# Altium PCB CurruntGetter.PcbDoc
Units mil, origin at the board's own origin, x right, y up, seen from the top; angles counter-clockwise.
Board outline 3820.48 x 2120.03 mil, 2 copper layers (Top Layer, Bottom Layer); 55 components, 31 nets, 190 pads, 33 vias.
Unrouted connection lines stored in the file: 22.
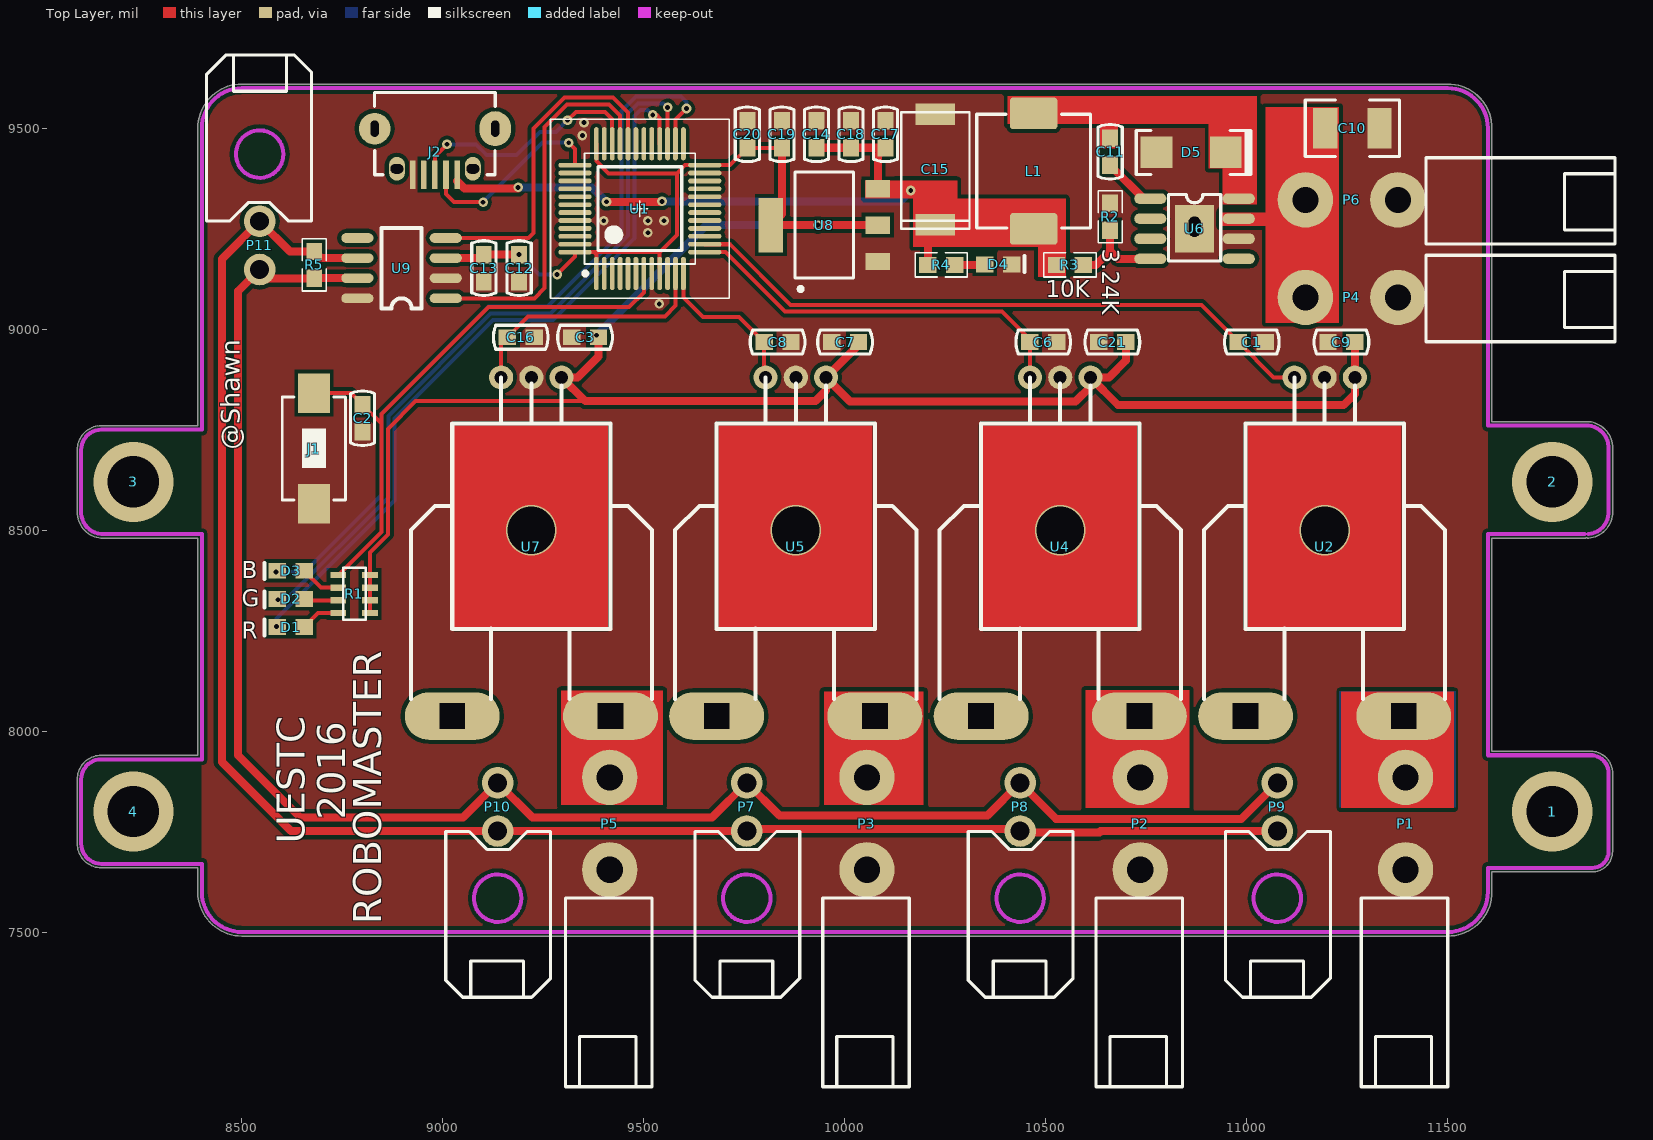
[diagram p0: Top Layer view]
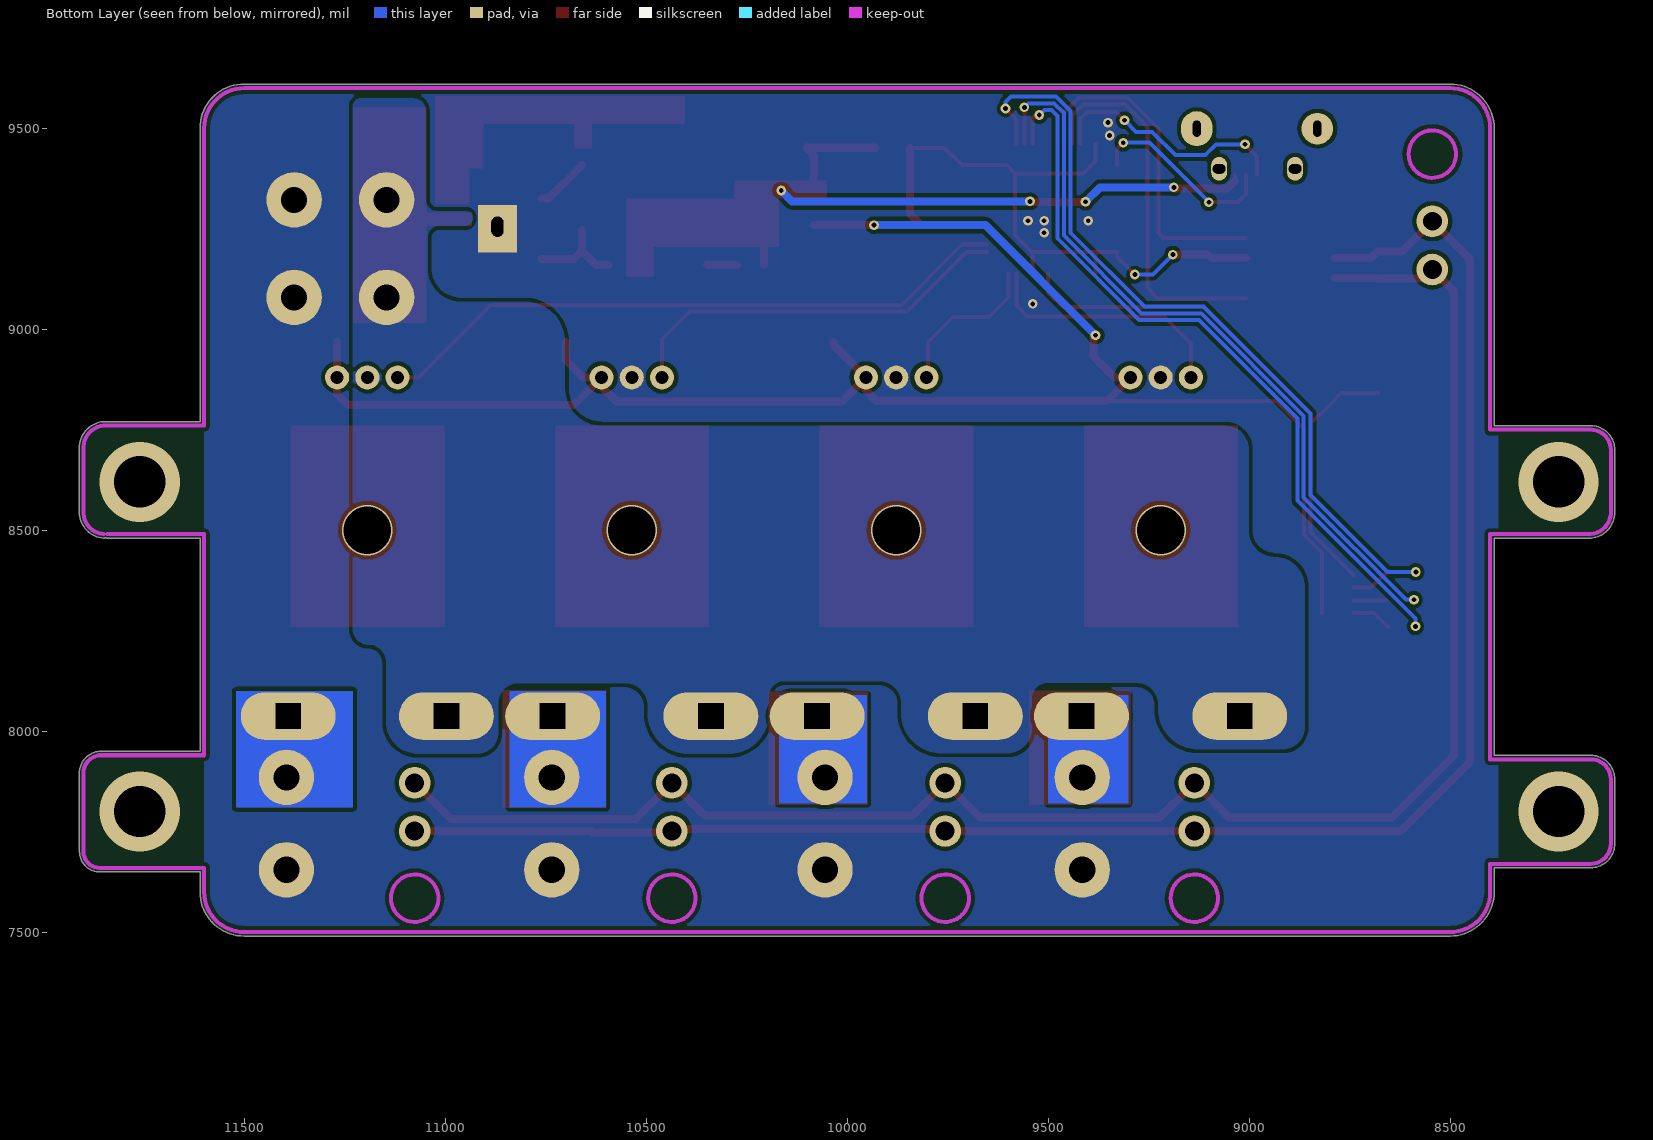
[diagram p1: Bottom Layer view, seen from below]

## Layer stack, top to bottom
Top Solder: solder mask 0.4, Solder Resist, Dk 3.5
Top Layer: signal copper 1.4
Dielectric 1: dielectric 12.6, FR-4, Dk 4.8
Bottom Layer: signal copper 1.4
Bottom Solder: solder mask 0.4, Solder Resist, Dk 3.5

## Board outline
8089.98,7720 ccw(c8150,7720) 8150,7659.98 ccw(c8150,7670) 8150.04,7659.98 8389.99,7659.98 8389.99,7600 ccw(c8500,7600) 8500,7489.98 11500,7489.98 ccw(c11500,7600) 11610.01,7600 11610.01,7649.98 11860,7649.98 ccw(c11860,7700) 11910.01,7700 11910.01,7900 ccw(c11900,7900) 11909.95,7901.11 ccw(c11855,7895) 11861.11,7949.95 ccw(c11855,7895) 11849.47,7950.02 11610.01,7950.02 11610.01,8479.99 11840,8479.99 ccw(c11840,8490) 11845,8481.32 ccw(c11850,8490) 11850.91,8480.03 ccw(c11845,8545) 11910.24,8545 ccw(c11845,8545) 11910.01,8550.44 11910.01,8699.56 ccw(c11845,8705) 11910.24,8705 ccw(c11845,8705) 11850.91,8769.97 ccw(c11850,8760) 11850,8770.01 11610.01,8770.01 11610.01,9500 ccw(c11500,9500) 11500,9610.01 8500,9610.01 ccw(c8500,9500) 8389.99,9500 8389.99,8760.01 8150,8760.01 8150,8760.02 cw(c8150,8750) 8150.04,8760.01 8150,8760.02 ccw(c8150,8700) 8089.98,8700 8089.98,8550.44 ccw(c8155,8545) 8090.03,8539.09 ccw(c8155,8545) 8149.09,8480.03 ccw(c8150,8490) 8150,8479.99 8389.99,8479.99 8389.99,7940.02 8150,7940.02 cw(c8150,7930) 8150.04,7940.02 8150,7940.02 ccw(c8150,7880) 8089.98,7880

## Design rules (kind name [scope] priority, off if disabled: settings)
Clearance [All] p1: gap=6
HoleSize [All] p1: absolutevalues=TRUE maxlimit=23333 minlimit=1 maxpercent=80.000 minpercent=20.000
HoleToHoleClearance [All] p1: gap=0 allowstackedmicrovias=TRUE
MinimumSolderMaskSliver [All] p1: minsoldermaskwidth=0
PolygonConnect [All] p1: connectstyle=Direct reliefconductorwidth=10 reliefentries=4 polygonreliefangle="90 Angle" airgapwidth=10
RoutingVias [All] p1: holewidth=28 width=50 viastyle="Through Hole" minholewidth=12 minwidth=24 maxholewidth=2333 maxwidth=2333
SilkToSilkClearance [All] p1: silktosilkclearance=0
SilkToSolderMaskClearance [IsPad] p1: minsilkscreentomaskgap=0 clearancetoexposedcopper=TRUE
SolderMaskExpansion [All] p1: expansion=4
Width [All] p1: maxlimit=2333 minlimit=10 preferedwidth=10
25 further rules are at their usual default settings.

## Components (designator, comment, footprint, x,y, rotation, side; value= is the part's Value field where it differs from the comment)
1 "Via_M3" Via_M3 11760,7800 r90 top
2 "Via_M3" Via_M3 11760,8620 r90 top
3 "Via_M3" Via_M3 8230,8620 r90 top
4 "Via_M3" Via_M3 8230,7800 r90 top
C1 "104" 0603C 11011,8968 r0 top
C2 "104" 0603C 8800,8780 r270 top
C3 "104" 0603C 9352,8980 r0 top
C6 "104" 0603C 10492,8968 r0 top
C7 "104" 0603C 9999,8968 r0 top
C8 "104" 0603C 9831,8968 r0 top
C9 "104" 0603C 11234,8968 r0 top
C10 "100uF" 1201C 11260,9500 r90 top
C11 "105" 0603C 10660,9440 r90 top
C12 "104" 0603C 9189.56,9153.57 r270 top
C13 "106" 0603C 9101.68,9153.57 r270 top
C14 "104" 0603C 9929.25,9486.47 r270 top
C15 "CAP_钽220" cap_钽E封装 10220,9400 r180 top
C16 "104" 0603C 9192,8980 r0 top
C17 "104" 0603C 10101.06,9486.47 r270 top
C18 "106" 0603C 10015.16,9486.47 r270 top
C19 "104" 0603C 9843.35,9486.47 r270 top
C20 "106" 0603C 9757.44,9486.47 r270 top
C21 "104" 0603C 10664,8968 r0 top
D1 "LED" LED_0603 8620,8260 r180 top
D2 "LED" LED_0603 8620,8330 r180 top
D3 "LED" LED_0603 8620,8400 r180 top
D4 "LED" LED_0603 10382.49,9160.1 r0 top
D5 "Diode_SS34" Diode_SS34 10860,9440 r0 top
J1 "KEY" KEY 8680,8700 r0 top
J2 "USB_MICRO" USB_MICRO 8980,9442 r180 top
L1 "15uH" Inductor7.2X7.2 10468,9400 r270 top
P1 "Header2X1" Header_POWER 11400,7520 r0 top
P2 "Header2X1" Header_POWER 10740,7520 r0 top
P3 "Header2X1" Header_POWER 10060,7520 r0 top
P4 "Header2X1" Header_POWER 11510.9,9083.94 r90 top
P5 "Header2X1" Header_POWER 9420,7520 r0 top
P6 "Header2X1" Header_POWER 11510.9,9326.81 r90 top
P7 "Header_CAN" Header2_3002 9760,7600 r0 top
P8 "Header_CAN" Header2_3002 10440,7600 r0 top
P9 "Header_CAN" Header2_3002 11080,7600 r0 top
P10 "Header_CAN" Header2_3002 9140,7600 r0 top
P11 "Header_CAN" Header2_3002 8540,9420 r180 top
R1 "1K" 8P4R_0603 8780,8340 r90 top
R2 "3K3" 0603R 10660,9280 r90 top
R3 "10K" 0603R 10560,9160 r0 top
R4 "1K" 0603R 10240,9160 r180 top
R5 "120" 0603R 8680,9160 r270 top
U1 "STM32F103CBT6" LQFP_48 9500,9300 r90 top
U2 "ACS758" PFF 11193.76,8880 r180 top
U4 "ACS758" PFF 10535.84,8880 r180 top
U5 "ACS758" PFF 9877.92,8880 r180 top
U6 "TPS5430/5450" TPS5430 10880,9260 r0 top
U7 "ACS758" PFF 9220,8880 r180 top
U8 "1117" SOT-223 9940,9260 r90 top
U9 "VD230" SO_8 8900,9160 r180 top

## Footprints (in the part's own frame and the unit in brackets; to place one, negate y for a bottom-side part, rotate by r counter-clockwise, add the part's x,y. Pads: shape width x height; smd on the part's side, far side on the other; paste and mask are expansions set on the pad)
8P4R_0603 [mm]
  rect 0.4x1 smd: 1(-1.169,-0.976) 2(-0.369,-0.976) 3(0.431,-0.976) 4(1.231,-0.976) 5(1.231,1.024) 6(0.431,1.024) 7(-0.369,1.024) 8(-1.169,1.024)
  silkscreen extent -1.6,-0.7 1.7,0.7, body extent -1.6,-1 1.7,1, height 0.7
0603C [mm]
  rect 1.1x1 smd: 1(-0.811,0) 2(0.889,0)
  silkscreen extent -1.69,-0.76 1.77,0.76, body extent -1.29,-0.47 1.31,0.53, height 0.89
0603R [mm]
  rect 1.1x1 smd: 1(-0.85,0) 2(0.85,0)
  silkscreen extent -1.65,-0.76 1.65,0.76, body extent -0.8,-0.4 0.8,0.4, height 0.45
1201C [mil]
  rect 100x60 smd: 1(0,64.72) 2(0,-70.28)
  silkscreen extent -70,-120 70,115, body extent -65,-115 65,110, height 100
cap_钽E封装 [mil]
  rect 98.43x53.54 smd: 1(-5,-135) 2(-5,140)
  silkscreen extent -90,-140 80,150, body extent -90,-165 80,170, height 161
Diode_SS34 [mm]
  rect 2x2 smd: 1(-2.15,0) 2(2.225,0)
  silkscreen extent -3.43,-1.4 3.81,1.38, body extent -2.4,-1.4 2.45,1.38, height 1.4
Header2_3002 [mm]
  round 2 hole 1.2: 1(-0.1,6.895) 2(-0.1,3.845)
  Keep-Out Layer circle w0.254: c-0.1,-0.398 r1.5
  silkscreen extent -3.38,-6.66 3.25,3.82, body extent -3.3,-6.73 3.17,7.28, height 7.11
Header_POWER [mm]
  round 3.5 hole 1.65: 1(-0.127,9.271) 2(-0.127,3.429)
  silkscreen extent -2.92,-10.29 2.54,1.65, body extent -2.92,-10.54 2.54,10.03, height 11.43
Inductor7.2X7.2 [mm]
  rrect20% 2x3 smd: 1(-3.479,0.044) 2(3.821,0.044)
  silkscreen extent -3.43,-3.56 3.77,3.64, body extent -3.4,-3.56 3.76,3.63, height 4
KEY [mm]
  rect 2x2.5 smd: 1(-0.025,3.581) 2(-0.025,-3.419)
  silkscreen extent -2.03,-3.17 1.97,3.33, body extent -2.06,-3.15 2.01,3.33, height 1.2
LED_0603 [mm]
  rect 1.1x1 smd: 1(-0.875,0.025) 2(0.825,0.025)
  silkscreen extent 1.63,-0.46 1.63,0.56, body extent -1.52,-0.51 1.4,0.64, height 0.66
LQFP_48 [mm]
  oval 2.1x0.3 smd: 1(-4.1,3.004) 2(-4.1,2.504) 3(-4.1,2.004) 4(-4.1,1.504) 5(-4.1,1.004) 6(-4.1,0.504) 7(-4.1,0.004) 8(-4.1,-0.496) 9(-4.1,-0.996) 10(-4.1,-1.496) 11(-4.1,-1.996) 12(-4.1,-2.496) 25(4.1,-2.496) 26(4.1,-1.996) 27(4.1,-1.496) 28(4.1,-0.996) 29(4.1,-0.496) 30(4.1,0.004) 31(4.1,0.504) 32(4.1,1.004) 33(4.1,1.504) 34(4.1,2.004) 35(4.1,2.504) 36(4.1,3.004)
  oval 0.3x2.1 smd: 13(-2.75,-3.846) 14(-2.25,-3.846) 15(-1.75,-3.846) 16(-1.25,-3.846) 17(-0.75,-3.846) 18(-0.25,-3.846) 19(0.25,-3.846) 20(0.75,-3.846) 21(1.25,-3.846) 22(1.75,-3.846) 23(2.25,-3.846) 24(2.75,-3.846) 37(2.75,4.354) 38(2.25,4.354) 39(1.75,4.354) 40(1.25,4.354) 41(0.75,4.354) 42(0.25,4.354) 43(-0.25,4.354) 44(-0.75,4.354) 45(-1.25,4.354) 46(-1.75,4.354) 47(-2.25,4.354) 48(-2.75,4.354)
  silkscreen extent -5.65,-5.4 5.65,5.9, body extent -3.5,-3.25 3.5,3.75, height 1.6
PFF [mm]
  round 1.524 hole 0.82: 1(-1.91,0) 2(0,0) 3(1.91,0)
  oval 6x3 hole 1.6 square: 4(5,21.4) 5(-5,21.4)
  Top Layer region: -4.851,3.023 4.877,3.023 4.877,15.773 -4.851,15.773
  silkscreen extent -7.62,0.01 7.62,20.32
SO_8 [mil]
  oval 80x24 smd: 1(-107,83) 2(-107,33) 3(-107,-17) 4(-107,-67) 5(113,-67) 6(113,-17) 7(113,33) 8(113,83)
  silkscreen extent -47,-92 53,108, body extent -91,-97 102,113, height 30
SOT-223 [mm]
  rect 1.1x1.55 smd: 1(-2.325,-3.604) 2(-0.025,-3.604) 3(2.275,-3.604)
  rect 3.45x1.55 smd: 2(-0.025,3.146)
  silkscreen extent -4.19,-2.08 3.32,1.62, body extent -3.33,-4.17 3.28,3.2, height 0.8
TPS5430 [mil]
  oval 80x26 smd: 1(-120,65) 2(-120,15) 3(-120,-35) 4(-120,-85) 5(100,-85) 6(100,-35) 7(100,15) 8(100,65)
  rect 98x118 smd: 6(-10,-10)
  rect 98x118 smd far side: 6(-10,-10)
  oval 50x70 hole 30 slot 50 at 90 deg: 6(-10,-5)
  silkscreen extent -75,-90 55,75, body extent -80,-100 60,80, height 30
USB_MICRO [mm]
  rect 0.35x1.8 smd: 1(-1.4,1.45) 2(-0.7,1.45) 3(0,1.45) 4(0.7,1.45) 5(1.4,1.45)
  oval 2x2.2 hole 0.508 slot 1.016 at 90 deg unplated: 6(-3.81,-1.45)
  oval 1x1.5 hole 0.6 slot 0.8 at 0 deg: 6(-2.4,1.09) 6(2.4,1.09)
  round 2 hole 0.508 slot 1.016 at 90 deg unplated: 6(3.81,-1.45)
  silkscreen extent -3.81,-3.74 3.81,1.47
Via_M3 [mil]

## Part data
C1 C2 C3 C6 C7 C8 C9 C11 C12 C14 C16 C17 C19 C21: library part C_104, "0603/0805"
C10: library part CAP100uF
C13 C18 C20: library part C_106, "0603/0805"
C15: "CAP"
D5: "肖特基二极管"
L1: library part Inductor, "屏蔽电感"
P1 P2 P3 P4 P5 P6: "power"
R1: library part R_8P4R
R2 R3 R4 R5: library part R, "0603/0805"
U1: "48"
U6: "降压"
U8: library part AMS1117-3.3
U9: "SO-8"

## Via types
v1: diameter 24, hole 12, Top Layer to Bottom Layer, tented both sides, 25 vias
v2: diameter 200, hole 128, Top Layer to Bottom Layer, 4 vias
v3: diameter 125.98, hole 118.11, Top Layer to Bottom Layer, 4 vias

## Nets (pads, with @x,y where several pads share a name; then routed paths per layer and width w, separated by ;. In a path a pad name is that pad's centre, name@x,y a point inside that pad or via, vN(x,y) a via of type N, cw(c..) or ccw(c..) an arc to the next point about the centre after c; other vN are vias at no path point)
3V3: C3.2 C7.2 C9.2 C12.1 C13.1 C19.2 C20.2 C21.2 R1.1 R1.2 R1.3 R1.4 U1.1 U1.9 U1.24 U1.36 U1.48 U2.1 U4.1 U5.1 U7.1 U8.2 U9.3 | length 6298.4
  Top Layer w10: R1.1 R1.2 R1.3 R1.4 8818.41,8444.58 8863,8489.18 8863,8752 8932,8821 9354.2,8821 ; v1(9284,9136) 9328.58,9180.58 U1.48 9375.27,9191.73 ; U1.1 9381.73,9185.27 9375.27,9191.73 ; U1.36 9381.73,9418.27 9412,9388 9582,9388 ; U1.9 9539.21,9191.21 ; C19.2 C20.2 9714.24,9408.27 U1.24 9602.27,9408.27 9582,9388 ; 9375.27,9191.73 9538.69,9191.73 9539.21,9191.21 ; 9539.21,9191.21 9582,9234 9582,9388
  Top Layer w20: U9.3 9093.19,9177 C13.1 v1(9189.56,9185.5) ; v1(9382,8985) C3.2 9387,8932 9335,8880 U7.1 9354.2,8821 9927,8821 9953.12,8847.12 U5.1 ; C19.2 9843.35,9286.22 9816.13,9259 v1(9933,9259) U8.2@10081.87,9259 ; C7.2 10034,8960.88 U5.1 ; C21.2 10699,8922 10657,8880 U4.1 ; C9.2 11269,8839 11241,8811 10680.04,8811 U4.1 ; U5.1 10013.12,8820 10574,8820 10611.04,8857.04 U4.1
  Bottom Layer w10: v1(9189.56,9185.5) 9239.06,9136 v1(9284,9136)
  Bottom Layer w20: v1(9382,8985) 9656,9259 v1(9933,9259)
5V: C14.2 C15.2 C17.2 C18.2 J2.1 L1.2 R3.1 R4.2 U8.3 | length 1571.6
  Top Layer w10: J2.1@9035.12,9368.88 J2.1
  Top Layer w20: J2.1@9035.12,9368.88 9054,9350 9187,9350 v1(9187,9353) ; v1(9407,9317) 9544,9317 v1(9545,9318) ; C14.2 C18.2 C17.2 10081.87,9432.28 U8.3 ; R4.2 10206.54,9241.54 C15.2
  Bottom Layer w20: v1(9187,9353) 9371,9353 v1(9407,9317) ; v1(9545,9318) 10137,9318 v1(10164,9345)
24V: C10.1 P4.1 P6.1 U2.4 U4.4 U5.4 U6.7 U7.4
CAN_H: P7.1 P8.1 P9.1 P10.1 P11.1 R5.2 U9.7 | length 4382.9
  Top Layer w20: U9.7 8680.46,9127 R5.2 8565.94,9126.54 P11.1 8490,9094.61 8490,7940 8645,7785 9049.61,7785 P10.1 9222.52,7785 9669.61,7785 P7.1 9837.52,7790 10354.61,7790 P8.1 10525.9,7781.62 10986.23,7781.62 P9.1
CAN_L: P7.2 P8.2 P9.2 P10.2 P11.2 R5.1 U9.6 | length 4369.4
  Top Layer w20: U9.6 8696.46,9177 R5.1 8619.09,9193.46 P11.2 8450,9174.68 8450,7923.43 8622.05,7751.38 P10.2 P7.2 9761.06,7756.38 10431.06,7756.38 P8.2 10439.44,7748 10633,7748 10636.38,7751.38 P9.2
CAN_RX: U1.32 U9.4 | length 844.4
  Top Layer w10: U9.4 9213,9227 9225,9239 9225,9499 9303,9577 9423,9577 9460.47,9539.53 U1.32
CAN_TX: U1.33 U9.1 | length 949.6
  Top Layer w10: U9.1 9228,9077 9253,9102 9253,9503 9309,9559 9413,9559 9440.79,9531.21 U1.33
CH1: C16.1 U1.11 U7.3 | length 637.4
  Top Layer w10: U7.3 9144.8,8964.73 C16.1 9212.07,9032 9552,9032 9578.58,9058.58 U1.11
CH2: C8.1 U1.12 U5.3 | length 390.9
  Top Layer w10: U1.12 9598.27,9078.73 9647,9030 9737.07,9030 C8.1 U5.3@9799.07,8883.65
CH3: C6.1 U1.13 U4.3 | length 985.9
  Top Layer w10: U1.13 9703.27,9191.73 9851,9044 10391,9044 C6.1@10460.07,8974.93 ; U4.3@10460.07,8880.57 C6.1
CH4: C1.1 U1.14 U2.3 | length 1604.4
  Top Layer w10: U1.14 9713.58,9211.42 9865,9060 10887.07,9060 C1.1 11067.07,8880 U2.3
CLK: J2.2 U1.37 | length 485.9
  Top Layer w10: J2.2 9007.56,9336.44 9028,9316 v1(9100,9316) ; v1(9313,9464) 9328.58,9448.42 U1.37
  Bottom Layer w10: v1(9100,9316) 9248,9464 v1(9313,9464)
DIO: J2.3 U1.34 | length 623.5
  Top Layer w10: J2.3 8980,9430 v1(9010,9460) ; v1(9310,9520) 9331,9541 9403,9541 9421.1,9522.9 U1.34
  Bottom Layer w10: v1(9010,9460) 9082,9460 9109,9433 9183,9433 9241,9491 9281,9491 v1(9310,9520)
GND: C1.2 C2.2 C3.1 C6.2 C7.1 C8.2 C9.1 C10.2 C12.2 C13.2 C14.1 C15.1 C16.2 C17.1 C18.1 C19.1 C20.1 C21.1 D4.2 D5.1 J1.2 J2.5 P1.2 P2.2 P3.2 P4.2 P5.2 P6.2 R2.2 U1.8 U1.20 U1.23 U1.35 U1.44 U1.47 U2.2 U4.2 U5.2 U6.6 U7.2 U8.1 U9.2 U9.8
  other v1: 9538,9063 9510,9240 9400,9270 9510,9270 9550,9270 9347,9482 9351,9514
LED_B: D3.2 U1.26 | length 1927.9
  Top Layer w10: U1.26 9578.58,9521.58 v1(9606,9549)
  Bottom Layer w10: v1(8585,8396) 8655,8396 8847,8588 8847,8790.25 9112.75,9056 9260,9056 9444,9240 9444,9543.25 9479.75,9579 9592,9579 9606,9565 v1(9606,9549)
LED_G: D2.2 U1.27 | length 1873.6
  Top Layer w10: U1.27 9558.9,9551.9 v1(9559,9552)
  Bottom Layer w10: v1(8589.54,8327) 8610.04,8327 8864,8580.96 8864,8784.63 9118.37,9039 9267.04,9039 9461,9232.96 9461,9537.63 9485.37,9562 9549,9562 v1(9559,9552)
LED_R: D1.2 U1.28 | length 1867.8
  Top Layer w10: v1(9522,9533) 9532,9533 9539.21,9525.79 U1.28
  Bottom Layer w10: v1(8586,8260.54) 8586,8280.33 8880,8574.33 8880,8778 9125,9023 9273.67,9023 9477,9226.33 9477,9531 9492,9546 9509,9546 v1(9522,9533)
NetC11_1: C11.1 U6.1 | length 134.4
  Top Layer w20: C11.1 10743.07,9325 U6.1
NetC11_2: C11.2 D5.2 L1.1 U6.8
NetD1_1: D1.1 R1.8 | length 99.7
  Top Layer w10: D1.1 8689.45,8293.98 R1.8
NetD2_1: D2.1 R1.7 | length 81.7
  Top Layer w10: D2.1@8657.99,8325.48 R1.7
NetD3_1: D3.1 R1.6 | length 102.6
  Top Layer w10: D3.1 8696.49,8356.97 R1.6
NetD4_1: D4.1 R4.1 | length 75
  Top Layer w20: R4.1 10346.92,9160 D4.1
NetR2_1: R2.1 R3.2 U6.4 | length 240.9
  Top Layer w20: R3.2 10625,9160 10660,9195 ; R2.1 10660,9195 ; U6.4 10680,9175 10660,9195
OSC_IN: U1.5
OSC_OUT: U1.6
OUT1: P1.1 U2.5
OUT2: P2.1 U4.5
OUT3: P3.1 U5.5
OUT4: P5.1 U7.5
RST: C2.1 J1.1 R1.5 U1.7 | length 1469.5
  Top Layer w10: J1.1 8770.93,8841 C2.1 8847,8764.93 ; R1.5 8847,8495.8 8847,8764.93 ; U1.7 9499.84,9091.84 9463,9055 9113,9055 8847,8789 8847,8764.93
pads on no net: J2.4 J2.6 U1.2 U1.3 U1.4 U1.10 U1.15 U1.16 U1.17 U1.18 U1.19 U1.21 U1.22 U1.25 U1.29 U1.30 U1.31 U1.38 U1.39 U1.40 U1.41 U1.42 U1.43 U1.45 U1.46 U6.2 U6.3 U6.5 U9.5
copper on no net:
  other v2: 8230,7800 11760,7800 8230,8620 11760,8620
  other v3: 9220,8500 9877.92,8500 10535.84,8500 11193.76,8500

## Polygon pours and split planes (outlines as drawn)
GND on Bottom Layer "Bottom Layer-No Net" (solid, remove dead copper, pour order 3): 8380,9600 8380,7500 11600,7500 11600,9600
24V on Bottom Layer "Bottom Layer-No Net" (solid, pour order 0): 11230,9554 11230,8254 cw(c11191,8254) 11191,8215 ccw(c11191,8171) 11147,8171 11147,8023 cw(c11068,8023) 11068,7944 11001,7944 10920,7944 cw(c10920,7996) 10868,7996 10868,8070 ccw(c10819,8070) 10819,8119 10552,8119 ccw(c10552,8063) 10496,8063 10496,8044 cw(c10396,8044) 10396,7944 10349,7944 10295,7944 cw(c10295,8044) 10195,8044 10195,8086 ccw(c10157,8086) 10157,8124 10150,8124 9920,8124 ccw(c9920,8069) 9865,8069 9865,8045 cw(c9765,8045) 9765,7945 9743,7945 9601,7945 cw(c9601,8005) 9541,8005 9541,8080 ccw(c9501,8080) 9501,8120 9280,8120 ccw(c9280,8066) 9226,8066 9226,8055 cw(c9126,8055) 9126,7955 8916,7955 cw(c8916,8009) 8862,8009 8862,8077 8862,8360 cw(c8935,8360) 8935,8433 ccw(c8935,8499) 9001,8499 9001,8701 cw(c9060,8701) 9060,8760 9353,8760 10611,8760 ccw(c10611,8851) 10702,8851 10702,8968 cw(c10802,8968) 10802,9068 10942,9068 10960,9068 ccw(c10960,9152) 11044,9152 11044,9227 ccw(c11014,9227) 11014,9257 10950,9257 cw(c10950,9275) 10932,9275 10932,9279 cw(c10947,9279) 10947,9294 11020,9294 ccw(c11020,9322) 11048,9322 11048,9543 cw(c11080,9543) 11080,9575 11209,9575 cw(c11209,9554) 11230,9554
GND on Top Layer "Bottom Layer-No Net" (solid, remove dead copper, pour order 1): 8400,9600 8400,7500 11600,7500 11600,9600

## Keep-outs
Keep-Out Layer:
  lines w10: 8100,8540 8100,8700 cw(c8150,8700) 8150,8750 8400,8750 8400,9500 cw(c8500,9500) 8500,9600 11500,9600 cw(c11500,9500) 11600,9500 11600,8760 11850,8760 cw(c11845,8705) 11900,8700 11900,8550 cw(c11845,8545) 11850,8490 ; 8100,8550 ccw(c8155,8545) 8150,8490 8400,8490 8400,7930 8150,7930 ccw(c8150,7880) 8100,7880 8100,7720 ccw(c8150,7720) 8150,7670 8400,7670 8400,7600 ccw(c8500,7600) 8500,7500 11500,7500 ccw(c11500,7600) 11600,7600 11600,7660 11860,7660 ccw(c11860,7700) 11900,7700 11900,7900 ccw(c11855,7895) 11850,7940 ; 11840,8490 11600,8490 11600,7940 11860,7940

## Other copper
Top Layer:
  rectangle net 24V: 10933,9257 11085,9291
  rectangle net 24V: 11047,9016 11230,9552.33
  rectangle net OUT4: 9294,7816 9547,8101
  rectangle net OUT3: 9948,7816 10196,8099
  rectangle net OUT2: 10599,7809 10857,8102
  rectangle net OUT1: 11234,7809 11515,8099
  rectangle net NetC11_2: 10635,9450 10680,9535
  rectangle net NetC11_2: 10940,9310 11025,9580
  rectangle net NetC11_2: 10905,9400 10995,9510
  rectangle net NetC11_2: 10405,9510 10995,9580
  rectangle net 5V: 10480,9130 10550,9205
  rectangle net 5V: 10170,9205 10550,9325
  rectangle net 5V: 10050,9325 10280,9370
Bottom Layer:
  rectangle net OUT4: 9300,7820 9500,8090
  rectangle net OUT3: 9950,7820 10170,8090
  rectangle net OUT2: 10600,7810 10840,8100
  rectangle net OUT1: 11230,7810 11520,8100

## Silkscreen, mask and mechanical layers (free items; w line width, h text height)
Top Overlay:
  text "3.24K" at 10640,9200 h42 r270
  text "10K" at 10500,9080 h42
  text "@Shawn" at 8510,8700 h80 r90
  text "B" at 8500,8380 h42
  text "G" at 8500,8310 h42
  text "R" at 8500,8230 h42
  text "2016" at 8780,7780 h120 r90
  text "UESTC" at 8680,7720 h120 r90
  text "ROBOMASTER" at 8870,7520 h120 r90

## Dimensions
11500,9600 to 11500,7115 on Top Overlay
8500,9600 to 8500,7500 on Top Overlay
11910.01,8550.44 to 8100,8540 on Top Overlay
8230,8620 to 11760,8620 on Top Overlay
11760,8620 to 11760,7800 on Top Overlay